# EAGLE board sensor_node (EAGLE 7.5.0)
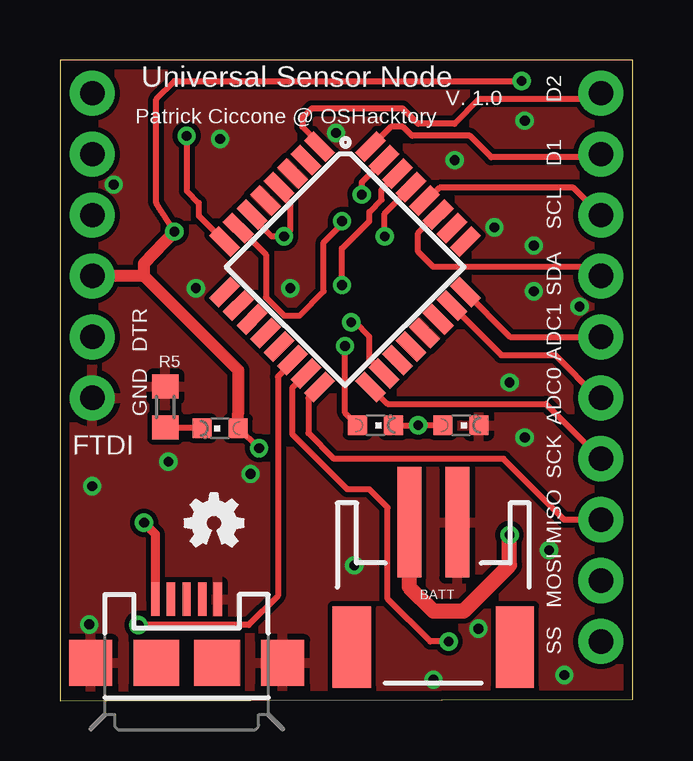
[diagram p0: board, top side]
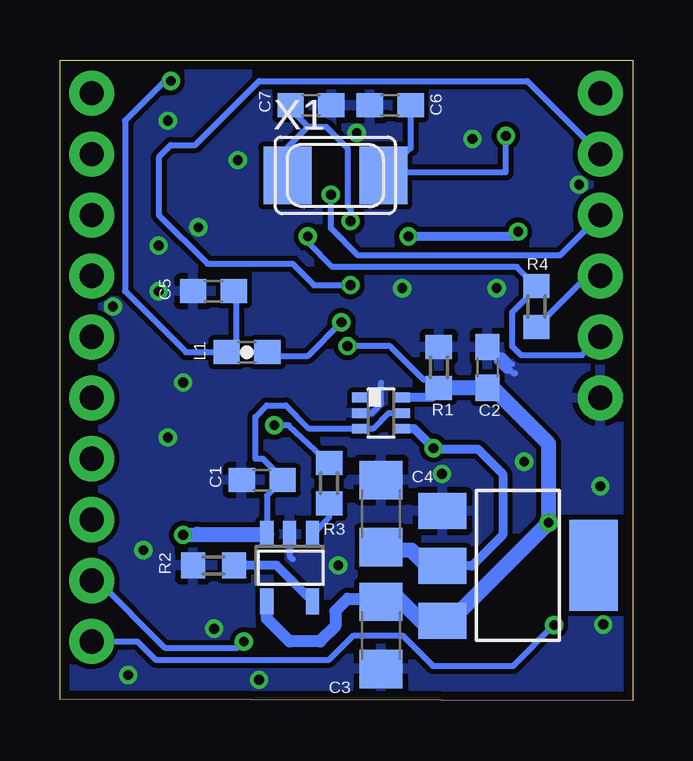
[diagram p1: board, bottom side, seen from below]

Size 23.88 x 26.71 mm. Coordinates in mm from the lower left corner, seen from the top.
Outline: 0,0 23.88,0.05 23.88,26.71 0,26.71 0,0
Copper layers (1*16): Top 0.0356mm / dielectric 1.5011mm / Bottom 0.0356mm
Design rules "oshpark-2layer *": minimum track width 6mil, minimum drill 15mil, track to track 8mil, track to pad 7mil, pad to pad 6mil, via to via 7mil, smd to smd 6mil, copper to edge 15mil, drill to drill 6mil, minimum pad ring 7mil, minimum via ring 7mil, stop-mask expansion 2.5mil, vias tented up to drill 16mil, thermal gap 10mil

## Footprints (pad centres in the part's own frame; a part is rotated, then mirrored left to right if it is on the bottom)
JST-2-SMD = smd 1 x 4.6: 1 -1,-3.7; 2 1,-3.7 | smd 1.6 x 3.4: NC1 -3.4,1.5; NC2 3.4,1.5
CHIPLED_0603 = smd 0.8 x 0.8: A 0,-0.75; C 0,0.75
C0603 = smd 1.1 x 1: 1 -0.85,0; 2 0.85,0
C1206 = smd 1.6 x 1.8: 1 -1.4,0; 2 1.4,0
1X06_NO_SILK = drill 1.016 pad 1.88: 1 0,0; 2 2.54,0; 3 5.08,0; 4 7.62,0; 5 10.16,0; 6 12.7,0
DCK_R-PDSO-G6 = smd 0.4 x 0.7: 1 -0.65,-0.85; 2 0,-0.85; 3 0.65,-0.85; 4 0.65,0.85; 5 0,0.85; 6 -0.65,0.85
SOT223 = smd 1.499 x 2.007: 1 -2.261,-3.15; 2 0.025,-3.15; 3 2.311,-3.15 | smd 3.81 x 2.007: 4 0,3.15
1X10_NO_SILK = drill 1.016 pad 1.88: 1 0,0; 2 2.54,0; 3 5.08,0; 4 7.62,0; 5 10.16,0; 6 12.7,0; 7 15.24,0; 8 17.78,0; 9 20.32,0; 10 22.86,0
USB-MICROB = smd 0.35 x 1.4: D+ 0,2.65; D- -0.65,2.65; GND 1.3,2.65; ID 0.65,2.65; VBUS -1.3,2.65 | smd 1.8 x 1.9: MT1 -4,0; MT2 4,0 | smd 1.9 x 1.9: P$1 -1.27,0; P$2 1.27,0
0603 = smd 1.1 x 1: 1 -0.85,0; 2 0.85,0
R0603 = smd 1 x 1.1: 1 -0.85,0; 2 0.85,0
TQFP32-08 = smd 1.27 x 0.559: 1 -4.293,2.8; 2 -4.293,2; 3 -4.293,1.2; 4 -4.293,0.4; 5 -4.293,-0.4; 6 -4.293,-1.2; 7 -4.293,-2; 8 -4.293,-2.8; 17 4.293,-2.8; 18 4.293,-2; 19 4.293,-1.2; 20 4.293,-0.4; 21 4.293,0.4; 22 4.293,1.2; 23 4.293,2; 24 4.293,2.8 | smd 0.559 x 1.27: 9 -2.8,-4.293; 10 -2,-4.293; 11 -1.2,-4.293; 12 -0.4,-4.293; 13 0.4,-4.293; 14 1.2,-4.293; 15 2,-4.293; 16 2.8,-4.293; 25 2.8,4.293; 26 2,4.293; 27 1.2,4.293; 28 0.4,4.293; 29 -0.4,4.293; 30 -1.2,4.293; 31 -2,4.293; 32 -2.8,4.293
SOT23-5 = smd 0.55 x 1.1: 1 -0.95,-1.3; 2 0,-1.3; 3 0.95,-1.3; 4 0.95,1.5; 5 -0.95,1.5
NX5032 = smd 2 x 2.4: P$1 2,0; P$2 -2,0

## Placement (x,y rotation side)
BATT  [JST-2-SMD]  15.57,3.73 180 top
BLUE  FULL  [CHIPLED_0603]  16.71,11.48 270 top
C1  4.7uF  [C0603]  15.44,9.19 180 bottom
C2  4.7uF  [C0603]  6.05,13.89 90 bottom
C3  4.7uF  [C1206]  10.49,2.72 270 bottom
C4  4.7uF  [C1206]  10.49,7.8 90 bottom
C5  100nF  [C0603]  17.48,17.07 180 bottom
C6  22pF  [C0603]  10.11,24.82 180 bottom
C7  22pF  [C0603]  13.41,24.82 0 bottom
FTDI  [1X06_NO_SILK]  1.35,25.32 270 top
GREEN  PWR  [CHIPLED_0603]  6.68,11.35 90 top
IC2  741G3157DCKR  [DCK_R-PDSO-G6]  10.49,11.99 270 bottom
IC3  AP2114  [SOT223]  4.78,5.64 270 bottom
J1  [1X10_NO_SILK]  22.56,25.32 270 top
J2  USB-MICROB  [USB-MICROB]  5.28,1.57 0 top
L1  10uH  [0603]  16.08,14.53 180 bottom
LOGO1  OSHW-LOGOMINI  [OSHW-LOGO-MINI]  6.43,7.42 0 top
R1  10k  [R0603]  8.08,13.89 270 bottom
R2  6.7k-10k  [R0603]  17.48,5.64 0 bottom
R3  1k  [R0603]  12.65,9.07 90 bottom
R4  10k  [R0603]  4.01,16.43 270 bottom
R5  1k  [R0603]  4.39,12.24 90 top
U1  ATMEGA328P_TQFP  [TQFP32-08]  11.89,18.08 315 top
U$1  MCP73831  [SOT23-5]  14.3,5.64 180 bottom
X1  [NX5032]  12.4,21.89 0 bottom
YELLOW  CHRG  [CHIPLED_0603]  13.16,11.48 270 top

## Library data of the parts
BATT = SparkFun-Connectors; BTM_NEG: -; BTM_POS: +; PROD_ID: CONN-11443; TOP_NEG: -; TOP_POS: +
BLUE GREEN YELLOW = led
C1-C7 R1-R5 = rcl
FTDI = SparkFun-Connectors; PROD_ID: CONN-08437
IC2 = 74xx-little-de
IC3 = burr-brown; MPN: REG1117; OC_FARNELL: 1097566; OC_NEWARK: 14P6981
J1 = SparkFun-Connectors; PROD_ID: CONN-11563
J2 = SparkFun-Connectors; PROD_ID: CONN-09505
L1 = SparkFun-Passives; PROD_ID: RES-07859
LOGO1 = SparkFun-Aesthetics
U1 = SparkFun-DigitalIC; PROD_ID: IC-09069
U$1 = GeekAmmo
X1 = adafruit

## Nets
3V7: C4.1 C5.1 FTDI.4 GREEN.A IC2.4 IC3.2 L1.2 R4.2 U1.4 U1.6
5V: C2.1 C3.1 IC2.6 IC3.3 J2.VBUS R1.2 U$1.4 YELLOW.A
ADC0: J1.6 U1.23
ADC1: J1.5 U1.24
ASDF: L1.1 U1.18
D1: J1.2 U1.32
D2: J1.1 U1.1
DTR: FTDI.5 R4.1 U1.29
GND: BATT.1 BLUE.C C1.2 C2.2 C3.2 C4.2 C5.2 C6.2 C7.2 FTDI.6 IC2.2 IC3.1 J2.GND J2.MT1 J2.MT2 R1.1 R2.1 R5.2 U1.3 U1.5 U1.21 U$1.2
HIGH: IC2.1
MISO: J1.8 U1.16
MOSI: J1.9 U1.15
N$1: R3.1 U$1.1
N$2: BLUE.A R3.2 YELLOW.C
N$5: GREEN.C R5.1
N$28: C7.1 U1.7 X1.P$2
N$29: C6.1 U1.8 X1.P$1
N$82: R2.2 U$1.5
NC1: U1.20
NC2: FTDI.1
NC3: U1.2
NC4: U1.9
NC5: U1.10
NC6: U1.11
NC7: U1.12
NC8: U1.13
NC9: U1.19
NC10: U1.22
NC11: U1.25
NC12: U1.26
RX: FTDI.2 U1.30
SCK: J1.7 U1.17
SCL: J1.3 U1.28
SDA: J1.4 U1.27
SS: J1.10 U1.14
TX: FTDI.3 U1.31
VBATT: BATT.2 C1.1 IC2.3 IC2.5 U$1.3

## Tracks (layer width: path | path; a pad name or v marks a point on that pad's centre or on a via)
3V7  (via drill 0.41)
  Top 0.254: v8.3,10.53 7.47,11.35 GREEN.A | v19.25,25.83 4.78,25.83 4.01,25.07 4.01,20.75 v4.78,19.56 | U1.6 8,20.19 8.84,19.35 v9.35,19.35 9.6,19.61 9.6,20.75 9.14,21.22 U1.4
  Top 0.508: GREEN.A 7.43,12 7.44,12.01 7.44,13.77 3.51,17.7 | 1.73,17.7 FTDI.4 3.51,17.7 | 3.51,17.7 3.51,18.21 v4.78,19.56
  Bottom 0.254: 16.52,17.07 16.52,14.53 L1.2 18.62,14.53 21.16,17.07 21.16,24.18 19.51,25.83 v19.25,25.83 | 16.36,17.23 16.52,17.07 | 16.52,17.07 C5.1 | FTDI.4 1.89,17.7 R4.2
  Bottom 0.381: IC3.2 6.71,5.61 5.41,6.91 5.41,9.45 6.43,10.46 8.24,10.46 v8.3,10.53 9.11,11.34 IC2.4 | v4.78,19.56 4.98,19.35 v9.35,19.35
  Bottom 0.635: IC3.2 7.95,5.64 8.59,5.64 9.22,6.27 10.49,6.27 C4.1
5V  (via drill 0.41)
  Top 0.254: 12.55,11.51 YELLOW.A 11.89,12 v11.89,14.78
  Top 0.381: J2.VBUS 3.98,6.94 v3.51,7.42
  Bottom 0.254: 8.11,13.26 R1.2 8.42,13.39 8.71,13.39 10.11,14.78 v11.89,14.78
  Bottom 0.381: R1.2 8.36,12.64 IC2.6
  Bottom 0.508: U$1.4 15.25,3.41 14.3,2.46 13.03,2.46 12.4,3.1 12.4,3.73 11.88,4.24 10.49,4.24 C3.1
  Bottom 0.635: C3.1 9.73,4.24 8.59,3.1 8.15,3.1 IC3.3 7.7,3.1 7.7,3.23 v3.51,7.42 3.51,10.72 5.83,13.04 C2.1 R1.2
ADC0
  Top 0.254: U1.23 18.4,14.4 20.65,14.4 22.43,12.62 J1.6
ADC1
  Top 0.254: U1.24 18.77,15.16 J1.5
ASDF  (via drill 0.41)
  Top 0.254: U1.18 12.9,14.24 12.9,15.16 12.29,15.77 v12.14,15.77
  Bottom 0.254: L1.1 15.08,14.38 13.54,14.38 v12.14,15.77
D1
  Top 0.254: J1.2 22.43,22.66 17.98,22.66 17.09,23.55 14.68,23.55 14.3,23.93 13.79,23.93 12.97,23.1 U1.32
D2
  Top 0.254: J1.1 22.3,25.07 17.48,25.07 16.46,24.05 14.94,24.05 14.3,24.69 10.49,24.69 10.11,24.31 10.11,23.93 10.83,23.2 U1.1
DTR  (via drill 0.41)
  Top 0.254: v13.54,19.35 13.54,20.3 U1.29
  Bottom 0.254: FTDI.5 2.11,14.4 4.65,14.4 5.03,14.78 5.03,16.18 4.01,17.2 R4.1 4.81,18.08 12.52,18.08 13.54,19.1 v13.54,19.35
GND  (via drill 0.41)
  Bottom 0.254: R1.1 7.95,14.53 8,14.7 | 11.13,11.99 IC2.2 10.87,11.99 10.49,12.37 10.49,13.26 | U$1.2 14.3,6.02 14.17,5.89 | 5.66,14.36 4.94,13.64 4.9,13.64 | C2.2 5.7,14.4 | 5.7,14.4 5.41,14.4 5.03,14.02 | 5.7,14.4 5.66,14.36 | 5.66,14.36 5.66,14.15 5.28,13.77 5.16,13.77
  other vias: 7.95,9.45 19.38,10.97 20.4,6.27 6.68,23.42 12.27,5.64 15.57,0.86 17.45,3 21.67,16.43 19.38,24.18 2.24,21.51 18.75,13.26 11.51,23.67 9.6,17.2 19.76,18.97 18.11,19.74 19.76,17.07 5.66,17.2 16.46,22.53 21.03,1.07 1.35,8.94 1.22,3.17 4.52,9.96
  pour Bottom: -0.05,26.97 23.95,26.97 23.95,-0.08 -0.05,-0.08
  pour Top: -0.05,26.97 23.95,26.97 23.95,-0.08 -0.05,-0.08
MISO
  Top 0.254: J1.8 21.03,7.54 18.49,10.08 11.43,10.08 10.36,11.15 10.36,12.6 U1.16
MOSI  (via drill 0.41)
  Top 0.254: v16.21,2.46 15.44,2.46 13.67,4.24 13.67,8.05 12.9,8.81 11.99,8.81 9.68,11.12 9.68,13.03 10.27,13.62 U1.15
  Bottom 0.254: J1.9 22.3,5 19.51,2.21 16.46,2.21 v16.21,2.46
N$1
  Bottom 0.254: U$1.1 12.65,7.64 R3.1
N$2  (via drill 0.41)
  Top 0.254: 15.06,11.47 v14.94,11.48 YELLOW.C | BLUE.A 15.06,11.47 | 15.06,11.47 14.94,11.35
  Bottom 0.254: R3.2 14.34,11.48 v14.94,11.48
N$5
  Top 0.254: R5.1 5.93,11.39 GREEN.C
N$28  (via drill 0.41)
  Top 0.254: U1.7 7.47,19.71 8.59,18.59 8.59,16.81 9.35,16.05 9.98,16.05 11,17.07 11,19.1 11.76,19.86 v11.76,19.99
  Bottom 0.254: 14.3,24.78 C7.1 14.26,24.65 13.54,23.93 | 13.54,23.93 12.78,23.93 11.89,23.04 11.89,20.62 11.76,20.5 v11.76,19.99 | X1.P$2 14.4,23.07 13.54,23.93
N$29  (via drill 0.41)
  Top 0.254: v5.28,23.55 5.28,21.26 5.79,20.75 5.79,20.22 U1.8
  Bottom 0.254: C6.1 9.26,23.03 9.93,22.35 | v5.28,23.55 5.28,22.02 9.6,22.02 9.93,22.35 | 9.93,22.35 X1.P$1
N$82
  Bottom 0.381: U$1.5 14.85,5.64 R2.2
RX  (via drill 0.41)
  Top 0.254: v11.76,17.32 11.76,18.85 12.9,19.99 12.9,20.37 13.41,20.88 13.41,21.31 U1.30
  Bottom 0.254: FTDI.2 4.39,25.83 15.57,25.83 18.24,23.16 19.25,23.16 19.76,22.66 19.76,20.24 17.73,18.21 14.17,18.21 13.28,17.32 v11.76,17.32
SCK
  Top 0.254: U1.17 12.97,13.07 13.67,12.37 20.27,12.37 J1.7
SCL
  Top 0.254: J1.3 21.41,21.39 15.82,21.39 15.27,20.84 U1.28
SDA
  Top 0.254: J1.4 22.17,18.08 15.57,18.08 14.94,18.72 14.94,19.48 15.73,20.27 U1.27
SS  (via drill 0.41)
  Top 0.254: v3.28,3.15 7.87,3.15 9.09,4.37 9.09,13.51 9.7,14.12 U1.14
  Bottom 0.254: J1.10 20.65,2.46 19.89,1.7 12.65,1.7 11.63,2.72 9.6,2.72 8.33,1.45 4.98,1.45 v3.28,3.15
TX  (via drill 0.41)
  Top 0.254: U1.31 12.58,21.61 v12.58,21.09
  Bottom 0.254: FTDI.3 3.03,18.56 11.44,18.56 12.58,19.7 v12.58,21.09
VBATT  (via drill 0.41)
  Top 0.635: BATT.2 14.55,7.42 14.55,4.75 15.57,3.73 16.84,3.73 18.75,5.64 v18.75,6.91
  Bottom 0.254: U$1.3 15.25,8.54 C1.1 14.62,9.29 15.41,10.08 15.73,10.08 15.73,11.83 15.25,12.31 14.46,12.31 13.51,11.35 11.44,11.35 IC2.3 11.28,11.35 10.81,11.35 10.17,11.99 IC2.5
  Bottom 0.635: v18.75,6.91 18.14,6.94 U$1.3

## Text on the board
tPlace: Universal Sensor Node | D2 | V. 1.0 | Patrick Ciccone @ OSHacktory | D1 | SCL | SDA | ADC1 | ADC0 | SCK | MISO | MOSI | SS
tNames: DTR | GND
tValues: RX | TX | 3V7